# Altium PCB StopIt.PcbDoc
Units mil, origin at the board's own origin, x right, y up, seen from the top; angles counter-clockwise.
Board outline 3160 x 2070 mil, 2 copper layers (Top Layer, Bottom Layer); 20 components, 26 nets, 83 pads, 4 vias.
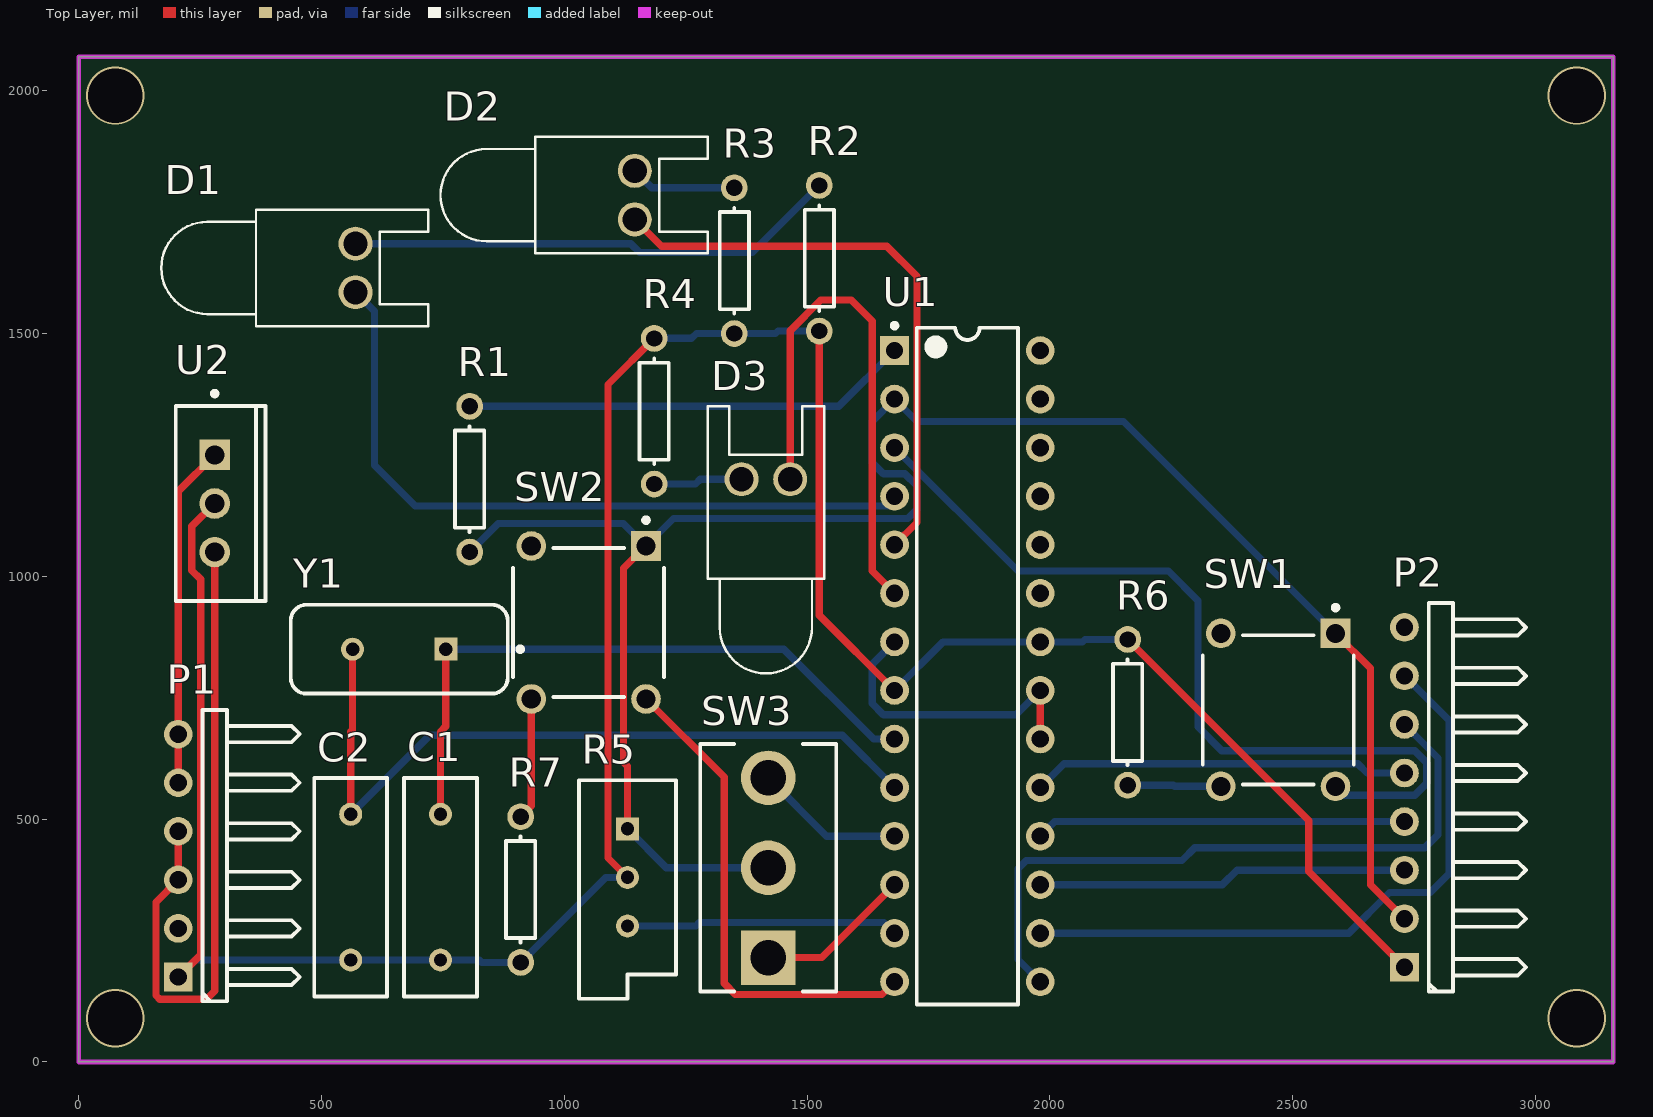
[diagram p0: Top Layer view]
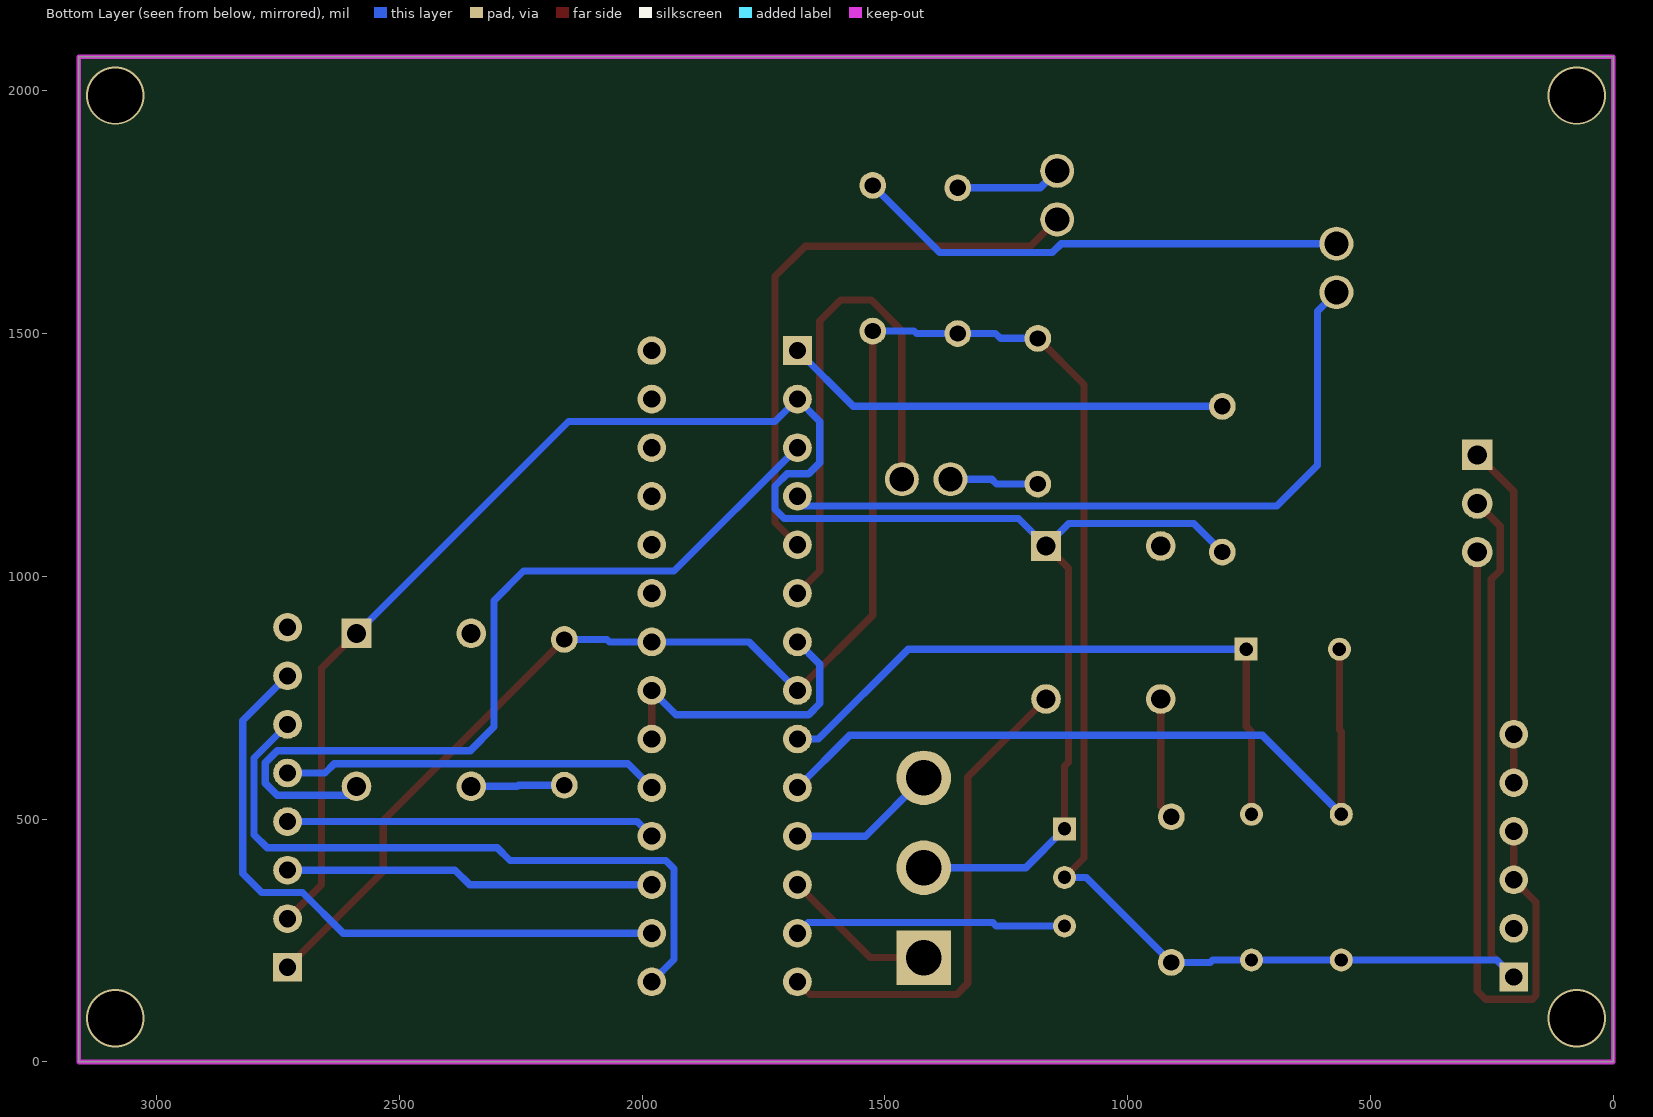
[diagram p1: Bottom Layer view, seen from below]

## Layer stack, top to bottom
Top Solder: solder mask 0.4, Solder Resist, Dk 3.5
Top Layer: signal copper 1.4
Dielectric 1: dielectric 12.6, FR-4, Dk 4.8
Bottom Layer: signal copper 1.4
Bottom Solder: solder mask 0.4, Solder Resist, Dk 3.5

## Board outline
0,0 3160,0 3160,2070 0,2070

## Design rules (kind name [scope] priority, off if disabled: settings)
BoardOutlineClearance [All] p1: gap=7.87 ignorepadtopadclearanceinfootprint=FALSE except(15.75: Arc-SplitBarrior Arc-SplitContinuation Track-SplitBarrior Track-SplitContinuation SMDPad-SplitBarrior SMDPad-SplitContinuation THPad-SplitBarrior THPad-SplitContinuation Via-SplitBarrior Via-SplitContinuation Fill-SplitBarrior Fill-SplitContinuation Poly-SplitBarrior Poly-SplitContinuation Region-SplitBarrior Region-SplitContinuation Text-SplitBarrior Text-SplitContinuation)
Clearance "Clearance Bottom Layer" [OnLayer('Bottom Layer')] p1: gap=8 ignorepadtopadclearanceinfootprint=TRUE except(10: Arc-Text Track-Text SMDPad-Text THPad-Text Via-Text Fill-Text Poly-Text Region-Text Text-Text)
Clearance "Clearance Top Layer" [OnLayer('Top Layer')] p2: gap=8 ignorepadtopadclearanceinfootprint=TRUE except(10: Arc-Text Track-Text SMDPad-Text THPad-Text Via-Text Fill-Text Poly-Text Region-Text Text-Text)
Clearance [All] p3: gap=7.87 ignorepadtopadclearanceinfootprint=FALSE except(3.5: Arc-Arc Arc-Track Arc-SMDPad Track-Track Track-SMDPad SMDPad-SMDPad; 5: Arc-Via Track-Via SMDPad-Via THPad-Via Via-Via; 10: Arc-Text Track-Text SMDPad-Text THPad-Text Via-Text Fill-Text Poly-Text Region-Text Text-Text)
HoleSize [All] p1: absolutevalues=TRUE maxlimit=248.03 minlimit=7.87 maxpercent=80.000 minpercent=20.000
MinimumAnnularRing [All] p1: minimumring=3
MinimumSolderMaskSliver [All] p1: minsoldermaskwidth=3.94
PolygonConnect PolygonConnect_1 [All] p1: thpad.connectstyle=Relief thpad.reliefconductorwidth=20 thpad.reliefentries=4 thpad.polygonreliefangle="90 Angle" thpad.airgapwidth=10 smdpad.connectstyle=Relief smdpad.reliefconductorwidth=20 smdpad.reliefentries=4 smdpad.polygonreliefangle="90 Angle" smdpad.airgapwidth=10 via.connectstyle=Direct via.reliefconductorwidth=20 via.reliefentries=4 via.polygonreliefangle="90 Angle" via.airgapwidth=10
RoutingCorners [All] p1: cornerstyle=Round minsetback=100 maxsetback=100
RoutingVias [All] p1: holewidth=19.68 width=39.37 viastyle="Through Hole" minholewidth=7.87 minwidth=17.72 maxholewidth=39.37 maxwidth=78.74
SilkToSilkClearance [All] p1: silktosilkclearance=3.94
SilkToSolderMaskClearance [IsPad] p1: minsilkscreentomaskgap=3.94 clearancetoexposedcopper=TRUE
SolderMaskExpansion [All] p1: expansion=4 istentingtop=FALSE
Width [All] p1: maxlimit=100 minlimit=3.5 preferedwidth=15
25 further rules are at their usual default settings.

## Components (designator, comment, footprint, x,y, rotation, side; value= is the part's Value field where it differs from the comment)
C1 "Cap" RAD-0.3 745,360 r270 top value=22pF
C2 "Cap" RAD-0.3 560,360 r90 top value=22pF
D1 "LED0" LED-0 570,1635 r270 top
D2 "LED0" LED-0 1145,1785 r270 top
D3 "LED0" LED-0 1415,1200 r0 top
P1 "Header 6H" HDR1X6H 205,175 r90 top
P2 "Header 8H" HDR1X8H 2730,195 r90 top
R1 "Res1" AXIAL-0.3 805,1200 r270 top value=10K
R2 "Res1" AXIAL-0.3 1525,1655 r270 top value=1K
R3 "Res1" AXIAL-0.3 1350,1650 r270 top value=1K
R4 "Res1" AXIAL-0.3 1185,1340 r90 top value=1K
R5 "RPot" VR5 1130,380 r270 top value=1K
R6 "Res1" AXIAL-0.3 2160,720 r90 top value=1K
R7 "Res1" AXIAL-0.3 910,355 r270 top value=1K
SW1 "ESE-20C421" FP-ESE-20C421-MFG 2470,725 r270 top
SW2 "ESE-20C421" FP-ESE-20C421-MFG 1050,905 r270 top
SW3 "A101SYCB04" FP-A101SYCB04-MFG 1420,400 r180 top
U1 "ATmega328-PU" 28P3 1830,815 r0 top
U2 "LM7805CT" FAIR-TO-220-3 280,1150 r0 top
Y1 "FOXSLF/160-20" FOX-FOXSLF160-20 660,850 r180 top

## Footprints (in the part's own frame and the unit in brackets; to place one, negate y for a bottom-side part, rotate by r counter-clockwise, add the part's x,y. Pads: shape width x height; smd on the part's side, far side on the other; paste and mask are expansions set on the pad)
28P3 [mm] "28-Pin Plastic Dual In-Line Package (PDIP)"
  rect 1.5x1.5 hole 0.9: 1(-3.81,16.51)
  round 1.5 hole 0.9: 2(-3.81,13.97) 3(-3.81,11.43) 4(-3.81,8.89) 5(-3.81,6.35) 6(-3.81,3.81) 7(-3.81,1.27) 8(-3.81,-1.27) 9(-3.81,-3.81) 10(-3.81,-6.35) 11(-3.81,-8.89) 12(-3.81,-11.43) 13(-3.81,-13.97) 14(-3.81,-16.51) 15(3.81,-16.51) 16(3.81,-13.97) 17(3.81,-11.43) 18(3.81,-8.89) 19(3.81,-6.35) 20(3.81,-3.81) 21(3.81,-1.27) 22(3.81,1.27) 23(3.81,3.81) 24(3.81,6.35) 25(3.81,8.89) 26(3.81,11.43) 27(3.81,13.97) 28(3.81,16.51)
  silkscreen extent -3.93,-17.7 2.65,17.93, body extent -3.6,-17.65 3.6,17.65, height 4.58
AXIAL-0.3 [mm] "Axial Device, Thru-Hole; 2 Leads; 0.3 in Pin Spacing"
  round 1.4 hole 0.85: 1(-3.81,0) 2(3.81,0)
  silkscreen extent -2.77,-0.76 2.77,0.76
FAIR-TO-220-3 [mm] "FM, 3-Leads, Body 10.2x4.7mm, Pitch 2.54mm"
  rect 1.6x1.6 hole 1: 1(0,2.54)
  round 1.6 hole 1: 2(0,0) 3(0,-2.54)
  silkscreen extent -2.04,-5.1 2.66,5.87, body extent -2.04,-5.1 2.66,5.1, height 18.95
FOX-FOXSLF160-20 [mm] "THD, 2-Leads, Body 11.35x4.65mm"
  rect 1.2x1.2 hole 0.7: 1(-2.44,0)
  round 1.2 hole 0.7: 2(2.44,0)
  silkscreen extent -6.45,-2.33 5.68,2.33, body extent -5.67,-2.32 5.68,2.33, height 3.6
FP-A101SYCB04-MFG [mil]
  rect 112.37x112.37 hole 73 paste-39370.1 mask+0: 1(0,185)
  round 112.37 hole 73 paste-39370.1 mask+0: 2(0,0) 3(0,-185)
  silkscreen extent -140,-255 140,255, body extent -144,-259 144,259, height 10
FP-ESE-20C421-MFG [mm]
  rect 1.55x1.55 hole 1 paste-1000 mask+0: a(-4,3)
  round 1.55 hole 1 paste-1000 mask+0: b(-4,-3) c(4,3) d(4,-3)
  silkscreen extent -5.47,-3.95 3.9,3.95, body extent -4.87,-4.05 4.87,4.05, height 0.25
HDR1X6H [mm] "Connector; Header; 6 Position; Right Angle"
  rect 1.5x1.5 hole 0.9: 1(0,0)
  round 1.5 hole 0.9: 2(2.54,0) 3(5.08,0) 4(7.62,0) 5(10.16,0) 6(12.7,0)
  silkscreen extent -1.27,-6.35 13.97,-1.27
HDR1X8H [mm] "Connector; Header; 8 Position; Right Angle"
  rect 1.5x1.5 hole 0.9: 1(0,0)
  round 1.5 hole 0.9: 2(2.54,0) 3(5.08,0) 4(7.62,0) 5(10.16,0) 6(12.7,0) 7(15.24,0) 8(17.78,0)
  silkscreen extent -1.27,-6.35 19.05,-1.27
LED-0 [mil] "LED; 2 Leads"
  round 70 hole 50: 1(50,0) 2(-50,0)
  silkscreen extent -120,-400 120,150
RAD-0.3 [mm] "Radial Cap, Thru-Hole; 2 Leads; 0.3 in Pin Spacing"
  round 1.2 hole 0.7: 1(-3.81,0) 2(3.81,0)
  silkscreen extent -5.71,-1.91 5.71,1.91
VR5 [mm] "Thru-Hole; 3 Leads"
  rect 1.2x1.2 hole 0.7: 1(-2.54,0)
  round 1.2 hole 0.7: 2(0,0) 3(2.54,0)
  silkscreen extent -5.08,-2.54 6.35,2.54

## Part data
C1 C2: "Capacitor", LatestRevisionDate=17-Jul-2002, LatestRevisionNote="Re-released for DXP Platform.", PackageDescription="Radial Cap, Thru-Hole; 2 Leads; 0.3 in Pin Spacing", PackageReference=RAD-0.3, Published=8-Jun-2000, Publisher="Altium Limited"
D1 D2 D3: "Typical INFRARED GaAs LED", LatestRevisionDate=08-Jul-2005, LatestRevisionNote="Mech Layer 1 removed.", PackageDescription="LED; 2 Leads", PackageReference=LED-0, Published=8-Jun-2000, Publisher="Altium Limited"
P1: "Header, 6-Pin, Right Angle", LatestRevisionDate=17-Jul-2002, LatestRevisionNote="Re-released for DXP Platform.", Publisher="Altium Limited"
P2: "Header, 8-Pin, Right Angle", LatestRevisionDate=17-Jul-2002, LatestRevisionNote="Re-released for DXP Platform.", Publisher="Altium Limited"
R1 R2 R3 R4 R6 R7: "Resistor", LatestRevisionDate=17-Jul-2002, LatestRevisionNote="Re-released for DXP Platform.", PackageDescription="Axial Device, Thru-Hole; 2 Leads; 0.3 in Pin Spacing", PackageReference=AXIAL-0.3, Published=8-Jun-2000, Publisher="Altium Limited"
R5: "Potentiometer", LatestRevisionDate=17-Jul-2002, LatestRevisionNote="Re-released for DXP Platform.", PackageDescription="Variable Resistor, Thru-Hole; 3 Leads", PackageReference=VR5, Published=8-Jun-2000, Publisher="Altium Limited", Set Position=0.5, Sim Note="Enter the Resistance value and the set point into parameter fields."
SW1 SW2: library part CMP-05613-000006-1, "SWITCH PUSH SPST-NO 0.1A 14V", Contact Current Rating=100mA, Max Operating Temperature=80°C, Max Voltage Rating (DC)=14V, Min Operating Temperature=-30°C, Operating Force=4N, Package Quantity=1200, Actuator Length=5.5mm, Actuator Type=Lever, Current Rating=100mA, Lead Free="Lead Free", Mount="Through Hole", Orientation=Straight, Packaging=Bulk, Radiation Hardening=No, REACH SVHC="No SVHC", RoHS Compliant=Yes, Series=ESE20C, Switch Function=Off-Mom, Termination="PC Pin", Throw Configuration=SPST, Voltage Rating (DC)=14V
SW3: library part CMP-03408-000017-1, "SWITCH TOGGLE SPDT 0.4VA 20V", Actuator Color=Chrome, Contact Current Rating=400mA, Contact Resistance=10mR, Flammability Rating="UL94 V-1", Insulation Resistance=30MR, Max Operating Temperature=85°C, Max Voltage Rating (AC)=20V, Min Operating Temperature=-30°C, Package Quantity=100, Power Rating=400mW, Actuator Length=10.41mm, Actuator Material=Phenolic, Actuator Type="Standard Round", Contact Material=Copper, Contact Plating=Gold, Depth=6.86mm, Electrical Life=6000Cycles, ELV=Compliant, Illumination Type=Non-Illuminated, Lead Free="Lead Free", Max Voltage Rating (DC)=20V, Mount=Panel, Number of Poles=1, Number of Positions=2, Orientation=Straight, Packaging=Bulk, Radiation Hardening=No, REACH SVHC="No SVHC", RoHS Compliant=Yes, Series="Gemini A", Switch Function=On-On, Termination="PC Pins", Throw Configuration=SPDT, Voltage Rating (AC)=20V, Voltage Rating (DC)=20V
U1: library part CMP-0095-00015-2, "8-bit AVR Microcontroller, 32KB Flash, 1KB EEPROM, 2KB SRAM, 28-pin PDIP, Industrial Grade (-40°C to 85°C)", ComponentLink1Description="Manufacturer URL", ComponentLink1URL=http://www.atmel.com/, ComponentLink2Description="ATmega48A/48PA/88A/88PA/168A/168PA/328/328P Datasheet", ComponentLink2URL=http://www.atmel.com/dyn/resources/prod_documents/8271.pdf, ComponentLink3Description="ATmega48A/48PA/88A/88PA/168A/168PA/328/328P Summary", ComponentLink3URL=http://www.atmel.com/dyn/resources/prod_documents/8271S.pdf, DatasheetVersion="revD, May-2011", PackageDescription="28-lead (0.300\"/7.62mm Wide) Plastic Dual Inline Package (PDIP)", PackageReference=28P3, PackageVersion="revB, Sep-2001", RevisionNote="DatasheetVersion updated. URLs added."
U2: library part CMP-2000-04938-1, "Positive Voltage Regulator, 5 V, 1 A, -40 to 125 degC, 3-Pin TO-220, RoHS, Tube", Manufacturer=FairchildSemiconductor, Maximum Input Voltage=35V, Maximum Output Current=2.2(Typ)A, Maximum Quiescent Current=8mA, Operating Temperature=-40to125degC, Output Voltage=5V, Package=3TO-220AB, Package Description="3-Pin Through Hole Device, Body 10 x 4.5 mm, Pitch 2.54 mm", Package Reference=TO-220, Typical Dropout Voltage @ Current=2@1AV, Accuracy=±4%, Category=LinearRegulator, Datasheet URL=https://datasheet.ciiva.com/26904/lm7805ct-26904988.pdf, Datasheet Version=Aug-12, Line Regulation=100mV, Load Regulation=100mV, Manufacturer URL=https://www.fairchildsemi.com/, Mounting=ThroughHole, Number of Outputs=1, Output Type=Fixed, Package URL=https://www.fairchildsemi.com/package-drawings/TO/TO220B03.pdf, Packaging=Rail/Tube, Polarity=Positive, Rad Hard=No, Type=Linear
Y1: library part CMP-1749-00003-1, "Resistance Weld Thru-Hole Crystal, 16 MHz, -20 to 70 degC, 2-Pin THD, RoHS, Bulk", Case\Package=Axial, Max Operating Temperature="155 degC", Min Operating Temperature="-55 degC", Package Quantity=200, Power Rating="250 mW", Resistance="221 kohm", Tolerance=1%, Voltage Rating="250 V", ComponentLink1Description="Manufacturer URL", ComponentLink1URL=http://www.foxonline.com/, ComponentLink2Description=Datasheet, ComponentLink2URL=http://www.foxonline.com/pdfs/hc49slf.pdf, DatasheetVersion=Mar-15, Length="0.248 inch", Mount="Through Hole", PackageDescription="2-Pin Through Hole Device, Body 11.35 x 4.65 mm", PackageReference=FOXSLF160-20, Packaging=Bulk, RoHSCompliant=true

## Via types
v1: diameter 120, hole 112, Top Layer to Bottom Layer, 4 vias

## Nets (pads, with @x,y where several pads share a name; then routed paths per layer and width w, separated by ;. In a path a pad name is that pad's centre, name@x,y a point inside that pad or via, vN(x,y) a via of type N, cw(c..) or ccw(c..) an arc to the next point about the centre after c; other vN are vias at no path point)
5V: P1.3 P1.4 U2.3 | length 1392.4
  Top Layer w15: P1.4 P1.3 159,329 159,137 167,129 263,129 280,146 U2.3
9V: P1.5 P1.6 U2.1 | length 706.1
  Top Layer w15: P1.5 P1.6 205,1175 U2.1
+5: U1.7 U1.20 U1.21 | length 622.3
  Top Layer w15: U1.20 U1.21
  Bottom Layer w15: U1.7 1634,819 1634,738 1657,715 1930,715 U1.21
GND: C1.2 C2.1 P1.1 P2.1 R2.2 R3.2 R4.2 R5.2 R6.2 R7.2 U1.8 U1.22 U2.2 | length 5786
  Top Layer w15: P1.1 251,221 251,994 233,1012 233,1103 U2.2 ; R5.2 1090,420 1090,1395 R4.2 ; R2.2 1525,920 U1.8 ; R6.2 2533,497 2533,392 P2.1
  Bottom Layer w15: P1.1 240,210 C2.1 C1.2 825,210 830,205 R7.2 1085,380 R5.2 ; R4.2 1262,1490 1272,1500 R3.2 1435,1500 1440,1505 R2.2 ; U1.8 1780,865 U1.22 2067,865 2072,870 R6.2
NetC1_1: C1.1 U1.9 Y1.1 | length 1345.1
  Top Layer w15: C1.1 745,680 756.06,691.06 Y1.1
  Bottom Layer w15: Y1.1 1452,850 1637,665 U1.9
NetC2_2: C2.2 U1.10 Y1.2 | length 1573.9
  Top Layer w15: C2.2 560,680 563.94,683.94 Y1.2
  Bottom Layer w15: C2.2 723,673 1572,673 U1.10
NetD1_1: D1.1 U1.4 | length 1497.9
  Bottom Layer w15: D1.1 609,1546 609,1229 693,1145 1668,1145 1668,1165 U1.4
NetD1_2: D1.2 R2.1 | length 1019.6
  Bottom Layer w15: D1.2 1137,1685 1155,1667 1387,1667 R2.1
NetD2_1: D2.1 U1.5 | length 1201.5
  Top Layer w15: D2.1 1200,1680 1664,1680 1726,1618 1726,1111 U1.5
NetD2_2: D2.2 R3.1 | length 219.5
  Bottom Layer w15: D2.2 1180,1800 R3.1
NetD3_1: D3.1 U1.6 | length 1099
  Top Layer w15: D3.1 1465,1506 1528,1569 1591,1569 1634,1526 1634,1011 U1.6
NetD3_2: D3.2 R4.1 | length 184.1
  Bottom Layer w15: R4.1 1270,1190 1280,1200 D3.2
NetR1_1: R1.1 U1.1 | length 922.6
  Bottom Layer w15: R1.1 1565,1350 U1.1
NetR5_3: R5.3 U1.13 | length 562
  Bottom Layer w15: R5.3 1271,280 1278,287 1658,287 U1.13
NetR6_1: R6.1 SW1.d | length 192.9
  Bottom Layer w15: R6.1 2254,570 2256.48,567.52 SW1.d
NetR7_1: R7.1 SW2.d | length 251.6
  Top Layer w15: R7.1 931.89,526.89 SW2.d
NetSW1_c: SW1.c U1.3 | length 1775.9
  Bottom Layer w15: U1.3 1934,1011 2244,1011 2305,950 2305,690 2354,641 2751,641 2776,616 2776,574 2751,549 2588.11,549 SW1.c
NetSW2_c: SW2.c U1.14 | length 1023.5
  Top Layer w15: SW2.c 1329,586.63 1329,162 1352,139 1654,139 U1.14
NetSW3_1: SW3.1 U1.12 | length 322.1
  Top Layer w15: SW3.1 1530,215 U1.12
NetSW3_3: SW3.3 U1.11 | length 309.7
  Bottom Layer w15: SW3.3 1540,465 U1.11
Pin_15: P2.6 U1.15 | length 1401.6
  Bottom Layer w15: U1.15 1934,211 1934,398 1951,415 2272,415 2298,441 2772,441 2799,468 2799,626 P2.6
Pin_16: P2.7 U1.16 | length 1338.1
  Bottom Layer w15: U1.16 2615,265 2699,349 2783,349 2822,388 2822,703 P2.7
Pin_17: P2.3 U1.17 | length 762.4
  Bottom Layer w15: U1.17 2355,365 2385,395 P2.3
Pin_18: P2.4 U1.18 | length 762.4
  Bottom Layer w15: U1.18 2010,495 P2.4
Pin_19: P2.5 U1.19 | length 778.2
  Bottom Layer w15: U1.19 2029,614 2634,614 2653,595 P2.5
VCC: P2.2 R1.2 R5.1 SW1.a SW2.a SW3.2 U1.2 | length 3988.2
  Top Layer w15: R5.1 1130,609 1122,617 1122,1016.37 SW2.a ; SW1.a 2660,810.59 2660,365 P2.2
  Bottom Layer w15: R1.2 864,1109 1121.59,1109 SW2.a 1224.63,1119 1707,1119 1726,1138 1726,1186 1701,1211 1657,1211 1634,1234 1634,1319 U1.2 1726,1319 2151.59,1319 SW1.a ; R5.1 1210,400 SW3.2
pads on no net: P1.2 P2.8 SW1.b SW2.b U1.23 U1.24 U1.25 U1.26 U1.27 U1.28
copper on no net:
  other v1: 75,90 3085,90 75,1990 3085,1990

## Keep-outs
Keep-Out Layer:
  the board outline again, w10